# Altium PCB POGO adapter.PcbDoc
Units mm, origin at the board's own origin, x right, y up, seen from the top; angles counter-clockwise.
Board outline 15 x 22.5 mm, 2 copper layers (L1, L2), stack 1.552 mm thick; 7 components, 6 nets, 12 pads, 24 vias.
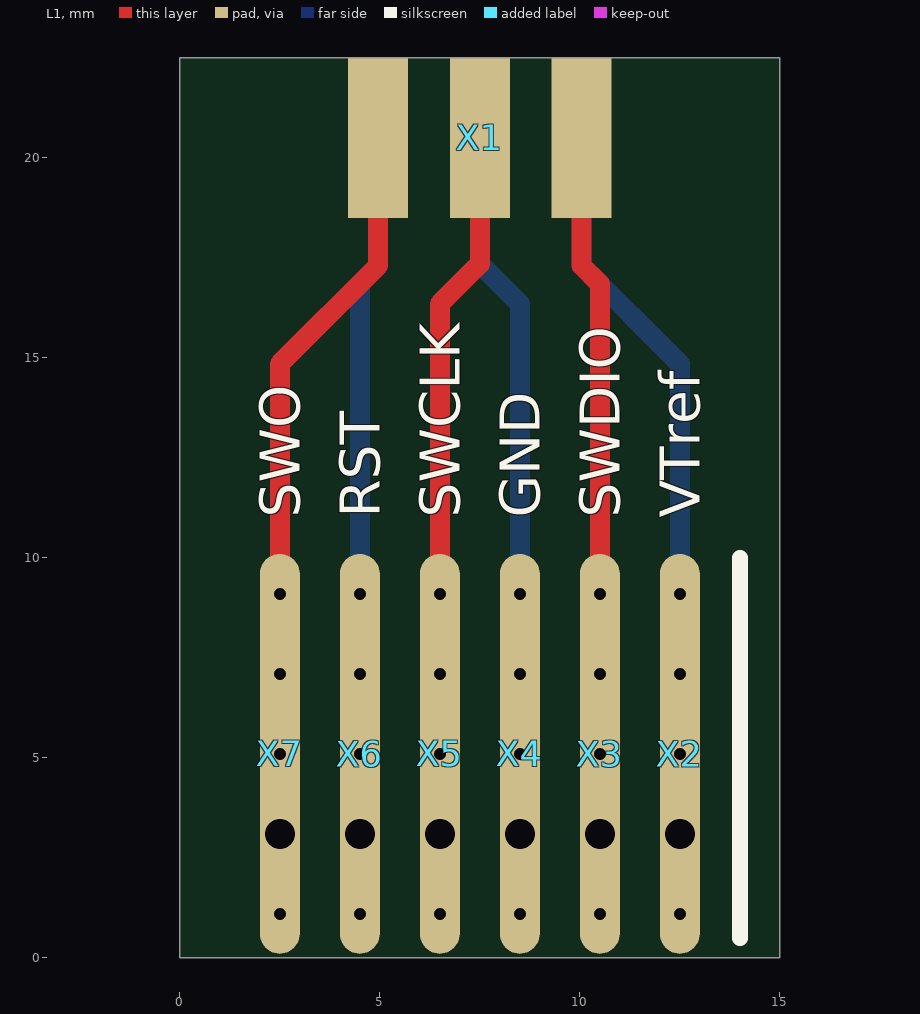
[diagram p0: L1 view]
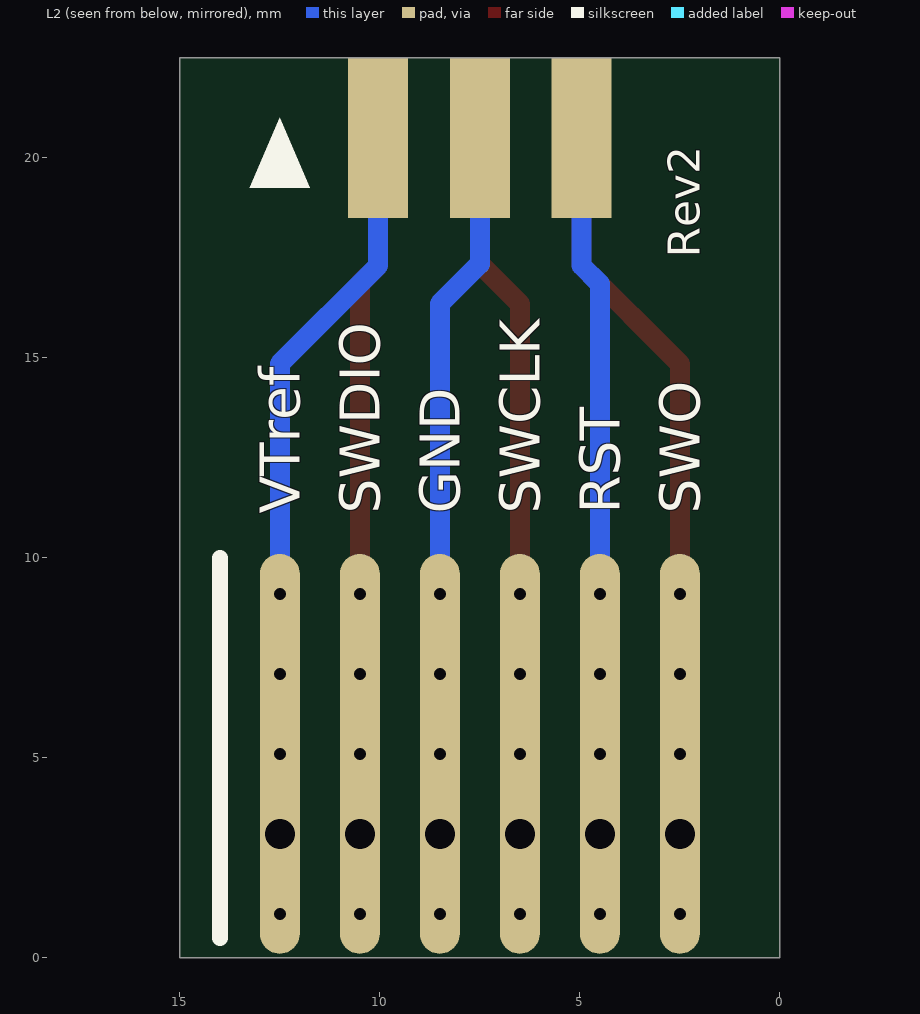
[diagram p1: L2 view, seen from below]

## Layer stack, top to bottom
Top Solder: solder mask 0.03, Solder Resist, Dk 3.5
L1: signal copper 0.0762
Core: core 1.4, FR-4, Dk 4.2
L2: signal copper 0.0762
Bot Solder: solder mask 0.03, Solder Resist, Dk 3.5

## Board outline
0,0 15,0 15,22.5 0,22.5

## Design rules (kind name [scope] priority, off if disabled: settings)
BoardOutlineClearance KeepoutBoardOutline [(ObjectKind = 'Track') And (Keepout = 'True')] p1: gap=0 ignorepadtopadclearanceinfootprint=FALSE
BoardOutlineClearance [All] p2: gap=0.5 ignorepadtopadclearanceinfootprint=FALSE
Clearance ClearanceNetA1_1 [InNet('NetA1_1')] p1 off: gap=0.15 ignorepadtopadclearanceinfootprint=FALSE except(0.2: Arc-Fill Arc-Poly Arc-Region Track-Fill Track-Poly Track-Region)
Clearance ClearanceTopSilk [OnLayer('Top Silk') vs OnLayer('L1')] p2: gap=0.15 ignorepadtopadclearanceinfootprint=FALSE except(0: Arc-Hole Track-Hole SMDPad-Hole THPad-Hole Via-Hole Fill-Hole Poly-Hole Region-Hole Text-Hole)
Clearance ClearanceBalun [HasFootprint('BALF-NRG-01D3')] p3: gap=0.1 ignorepadtopadclearanceinfootprint=FALSE except(0: Arc-Hole Track-Hole SMDPad-Hole THPad-Hole Via-Hole Fill-Hole Poly-Hole Region-Hole Text-Hole) // BALF-NRG-01D3
Clearance ClearanceBalun_CC112X [HasFootprint('BALF-112X-01D3')] p4: gap=0.1 ignorepadtopadclearanceinfootprint=FALSE except(0: Arc-Hole Track-Hole SMDPad-Hole THPad-Hole Via-Hole Fill-Hole Poly-Hole Region-Hole Text-Hole) // BALF-NRG-01D3
Clearance ClearancePolygonANT [InNet('ANT') vs InPoly] p5: gap=0.45 ignorepadtopadclearanceinfootprint=FALSE except(0: Arc-Hole Track-Hole SMDPad-Hole THPad-Hole Via-Hole Fill-Hole Poly-Hole Region-Hole Text-Hole)
Clearance Wire_Jumpers [HasFootprint('WIRE')] p6: gap=0.01 ignorepadtopadclearanceinfootprint=FALSE except(0: Arc-Hole Track-Hole SMDPad-Hole THPad-Hole Via-Hole Fill-Hole Poly-Hole Region-Hole Text-Hole) // Pour over wire jumpers
Clearance VD [All vs HasFootprint('DPF(S-PX2SON-N6)')] p7: gap=0.1 ignorepadtopadclearanceinfootprint=FALSE except(0: Arc-Hole Track-Hole SMDPad-Hole THPad-Hole Via-Hole Fill-Hole Poly-Hole Region-Hole Text-Hole) // For small diods (ECD protection)
Clearance L1 [OnLayer('L1')] p8: gap=0.15 ignorepadtopadclearanceinfootprint=FALSE except(0: Arc-Hole Track-Hole SMDPad-Hole THPad-Hole Via-Hole Fill-Hole Poly-Hole Region-Hole Text-Hole)
Clearance L2 [OnLayer('L2')] p9: gap=0.15 ignorepadtopadclearanceinfootprint=FALSE except(0: Arc-Hole Track-Hole SMDPad-Hole THPad-Hole Via-Hole Fill-Hole Poly-Hole Region-Hole Text-Hole)
ComponentClearance PowerConnector [(ObjectKind = '3D Body') And (Identifier = '039012040')] p1: gap=0 collisioncheckmode=3 verticalgap=0 showdistances=FALSE
ComponentClearance MezzanineConnectors [InComponent('X7') or InComponent('X8') vs (ObjectKind = '3D Body') And (Identifier = 'mezzanine')] p2: gap=0 collisioncheckmode=3 verticalgap=0 showdistances=FALSE
ComponentClearance [(ObjectKind = '3D Body') And (Identifier = '039012040')] p3: gap=0 collisioncheckmode=3 verticalgap=0 showdistances=TRUE
ComponentOrientations [All] p1: allowedrotations=32
DiffPairsRouting [All] p1: maxlimit=0.4 minlimit=0.4 mostfreqgap=0.4 toplayer_minwidth=0.15 toplayer_maxwidth=0.3 toplayer_prefwidth=0.3 bottomlayer_minwidth=0.15 bottomlayer_maxwidth=0.3 bottomlayer_prefwidth=0.3 maxuncoupledlength=12.7
HoleSize [All] p1: absolutevalues=TRUE maxlimit=3 minlimit=0.3 maxpercent=80.000 minpercent=20.000
HoleToHoleClearance [All] p1: gap=0.1 allowstackedmicrovias=TRUE
MatchedLengths USB2 [InNetClass('USB2')] p1: tolerance=1 checknetsindiffpair=TRUE checkdiffpairvsdiffpair=FALSE checkxsignals=FALSE checkothers=FALSE
MatchedLengths USB1 [InNetClass('USB1')] p2: tolerance=1 checknetsindiffpair=TRUE checkdiffpairvsdiffpair=FALSE checkxsignals=FALSE checkothers=FALSE
MatchedLengths BLE_SPI [InNetClass('BLE_SPI')] p3: tolerance=1 checknetsindiffpair=TRUE checkdiffpairvsdiffpair=FALSE checkxsignals=FALSE checkothers=FALSE
MatchedLengths ACEEL_SPI [InNetClass('ACC_SPI')] p4: tolerance=1 checknetsindiffpair=TRUE checkdiffpairvsdiffpair=FALSE checkxsignals=FALSE checkothers=FALSE
MatchedLengths DEBUG_Lengths [InNetClass('DEBUG')] p5: tolerance=1 checknetsindiffpair=TRUE checkdiffpairvsdiffpair=FALSE checkxsignals=FALSE checkothers=FALSE
MinimumAnnularRing MinimumAnnularRing_1 [(ObjectKind = 'Via') And (AsMM(PadXSize_TopLayer) = 0.4)] p1: minimumring=0
MinimumAnnularRing [(ObjectKind = 'Via') And (AsMM(PadXSize_TopLayer) <> 0.4)] p2: minimumring=0.2
MinimumSolderMaskSliver [All] p1 off: minsoldermaskwidth=0.148
NetAntennae Keepout [(ObjectKind = 'Track') And (Keepout = 'True')] p1: netantennaetolerance=100
PlaneClearance [All] p1: clearance=0.15
PlaneConnect [All] p1: planeconnectstyle=Relief reliefexpansion=0.5 reliefentries=4 reliefconductorwidth=0.25 reliefairgap=0.15
PolygonConnect PolygonConnect_Vias [(ObjectKind = 'Via')] p1: connectstyle=Direct reliefconductorwidth=0.254 reliefentries=4 polygonreliefangle="90 Angle" airgapwidth=0.254
PolygonConnect PolygonConnect_L2 [OnLayer('L2')] p2: connectstyle=Relief reliefconductorwidth=0.3 reliefentries=4 polygonreliefangle="90 Angle" airgapwidth=0.2
PolygonConnect PolygonConnect_L1 [OnLayer('L1')] p3: connectstyle=Relief reliefconductorwidth=0.3 reliefentries=4 polygonreliefangle="90 Angle" airgapwidth=0.2
RoutingCorners [All] p1: cornerstyle=45-Degree minsetback=2.5 maxsetback=2.5
RoutingVias [All] p1: holewidth=0.3 width=0.7 viastyle="Through Hole" minholewidth=0.3 minwidth=0.4 maxholewidth=0.3 maxwidth=0.7
SMDEntry [All] p1: side=TRUE corner=TRUE anyangle=TRUE
SMDToCorner [All] p1: distance=0
SMDToPlane [All] p1: distance=0
ShortCircuit NoNet [Not InAnyNet vs Not InAnyNet] p1: allowed=TRUE
SilkToSilkClearance [All] p1: silktosilkclearance=0
SilkToSolderMaskClearance [IsPad] p1: minsilkscreentomaskgap=0.02 clearancetoexposedcopper=TRUE
SolderMaskExpansion SolderMaskKeepOut [OnLayer('Keepout')] p1: expansion=0.25
SolderMaskExpansion [All] p2: expansion=0.075
UnRoutedNet "Without GNDs" [not InNetClass('GND')] p1:
UnRoutedNet [All] p2 off:
Width "VD ESD" [InComponent('VD1')] p1: maxlimit=0.1 minlimit=0.1 preferedwidth=0.1
Width Width_GNDB [InNet('GNDB')] p2: maxlimit=0.254 minlimit=0.23 preferedwidth=0.23
Width Width_+V_BLE [InNet('+V_BLE')] p3: maxlimit=0.3 minlimit=0.23 preferedwidth=0.23
Width Width_GND [InNetClass('GND')] p4: maxlimit=5 minlimit=0.15 preferedwidth=0.3
Width Width_VDD [InNetClass('POWER')] p5: maxlimit=5 minlimit=0.15 preferedwidth=0.3
Width [All] p6: maxlimit=5 minlimit=0.15 preferedwidth=0.2
17 further rules are at their usual default settings.

## Components (designator, comment, footprint, x,y, rotation, side; value= is the part's Value field where it differs from the comment)
X1 "IDC10 edge" "BH-6 EDGE" 10.04,20.5 r180 top locked
X2 "POGO" POGO 12.5,5.1 r0 top locked
X3 "POGO" POGO 10.5,5.1 r0 top locked
X4 "POGO" POGO 8.5,5.1 r0 top locked
X5 "POGO" POGO 6.5,5.1 r0 top locked
X6 "POGO" POGO 4.5,5.1 r0 top locked
X7 "POGO" POGO 2.5,5.1 r0 top locked

## Footprints (in the part's own frame and the unit in brackets; to place one, negate y for a bottom-side part, rotate by r counter-clockwise, add the part's x,y. Pads: shape width x height; smd on the part's side, far side on the other; paste and mask are expansions set on the pad)
"BH-6 EDGE" [mm]
  rect 1.5x4 smd far side: 1(0,0) 3(2.54,0) 5(5.08,0)
  rect 1.5x4 smd: 2(0,0) 4(2.54,0) 6(5.08,0)
  body extent -5.08,-10.87 10.16,1.33, height 3.84
POGO [mm]
  oval 1x10 hole 0.3: 1(0,0)

## Via types
v1: diameter 0.7, hole 0.3, L1 to L2, tented both sides, 18 vias
v2: diameter 0.75, hole 0.75, L1 to L2, tented both sides, 6 vias

## Nets (pads, with @x,y where several pads share a name; then routed paths per layer and width w, separated by ;. In a path a pad name is that pad's centre, name@x,y a point inside that pad or via, vN(x,y) a via of type N, cw(c..) or ccw(c..) an arc to the next point about the centre after c; other vN are vias at no path point)
GND: X1.3 X4.1 | length 15.2
  L2 w0.5: X1.3@7.5,19.85 7.5,17.35 8.5,16.35 v1(8.5,9.1) v1(8.5,7.1) X4.1
  other v1: 8.5,1.1
  other v2: 8.5,3.1
RST: X1.5 X6.1 | length 14.9
  L2 w0.5: X6.1 v1(4.5,7.1) v1(4.5,9.1) 4.5,16.85 4.96,17.31 X1.5@4.96,19.85
  other v1: 4.5,1.1
  other v2: 4.5,3.1
SWCLK: X1.4 X5.1 | length 15.2
  L1 w0.5: X5.1 v1(6.5,7.1) v1(6.5,9.1) 6.5,16.35 7.5,17.35 X1.4@7.5,19.85
  other v1: 6.5,1.1
  other v2: 6.5,3.1
SWDIO: X1.2 X3.1 | length 14.9
  L1 w0.5: X1.2@10.04,19.85 10.04,17.31 10.5,16.85 v1(10.5,9.1) v1(10.5,7.1) X3.1
  other v1: 10.5,1.1
  other v2: 10.5,3.1
SWO: X1.6 X7.1 | length 15.8
  L1 w0.5: X7.1 v1(2.5,7.1) v1(2.5,9.1) 2.5,14.85 4.96,17.31 X1.6@4.96,19.85
  other v1: 2.5,1.1
  other v2: 2.5,3.1
VTref: X1.1 X2.1 | length 15.8
  L2 w0.5: X1.1@10.04,19.85 10.04,17.31 12.5,14.85 v1(12.5,9.1) v1(12.5,7.1) X2.1
  other v1: 12.5,1.1
  other v2: 12.5,3.1

## Silkscreen, mask and mechanical layers (free items; w line width, h text height)
Top Overlay:
  lines w0.4: 14,0.5 14,10
  text "SWO" at 3,11 h1 r90
  text "RST" at 5,11 h1 r90
  text "SWCLK" at 7,11 h1 r90
  text "GND" at 9,11 h1 r90
  text "SWDIO" at 11,11 h1 r90
  text "VTref" at 13,11 h1 r90
Bot Overlay:
  region: 12.5,21 11.75,19.25 13.25,19.25
  lines w0.4: 14,0.5 14,10
  text "Rev2" at 2,17.5 h0.8 r270
  text "SWO" at 2,11.1 h1 r270
  text "RST" at 4,11.1 h1 r270
  text "SWCLK" at 6,11.1 h1 r270
  text "GND" at 8,11.1 h1 r270
  text "SWDIO" at 10,11.1 h1 r270
  text "VTref" at 12,11.1 h1 r270
Top Solder:
  the board outline again, w0.2
Bot Solder:
  the board outline again, w0.2
Board:
  the board outline again, w0.2

## Dimensions
0,0 to 15,0 on Dimensions
15,22.5 to 15,0 on Dimensions